# EAGLE board MDCluster (EAGLE 9.6.2), part 1 of 2
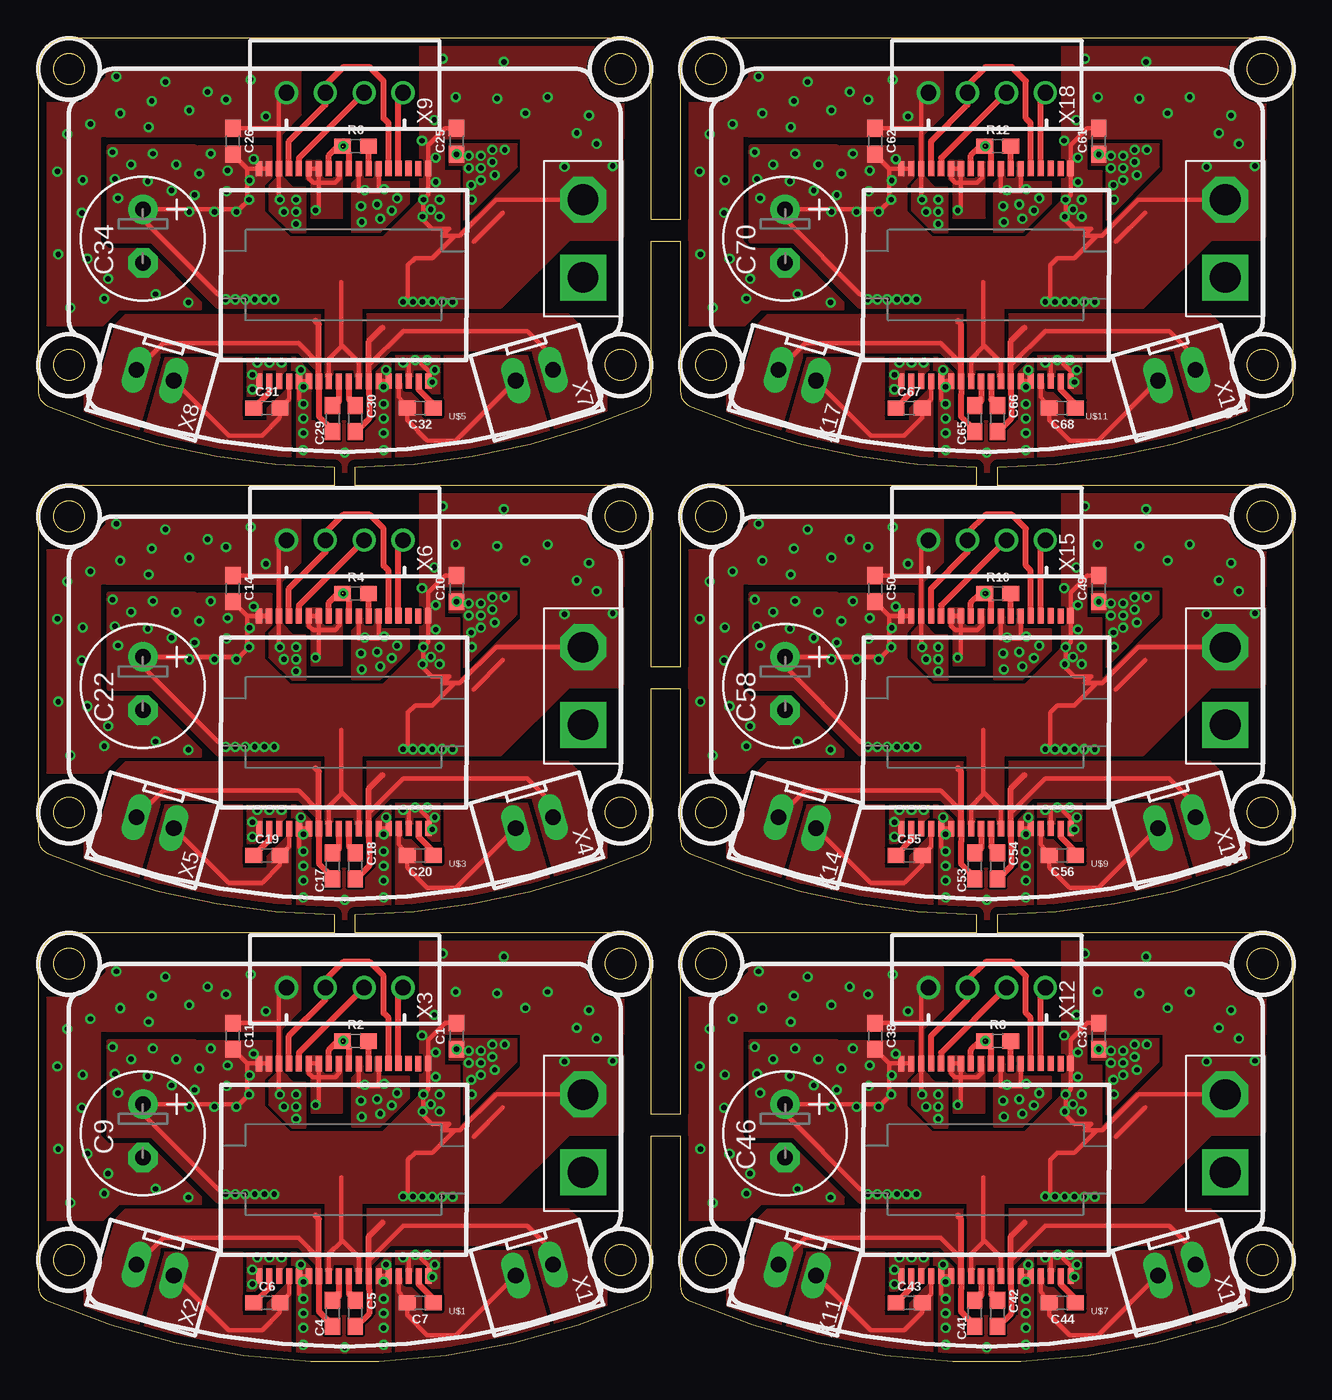
[diagram p0: board, top side]
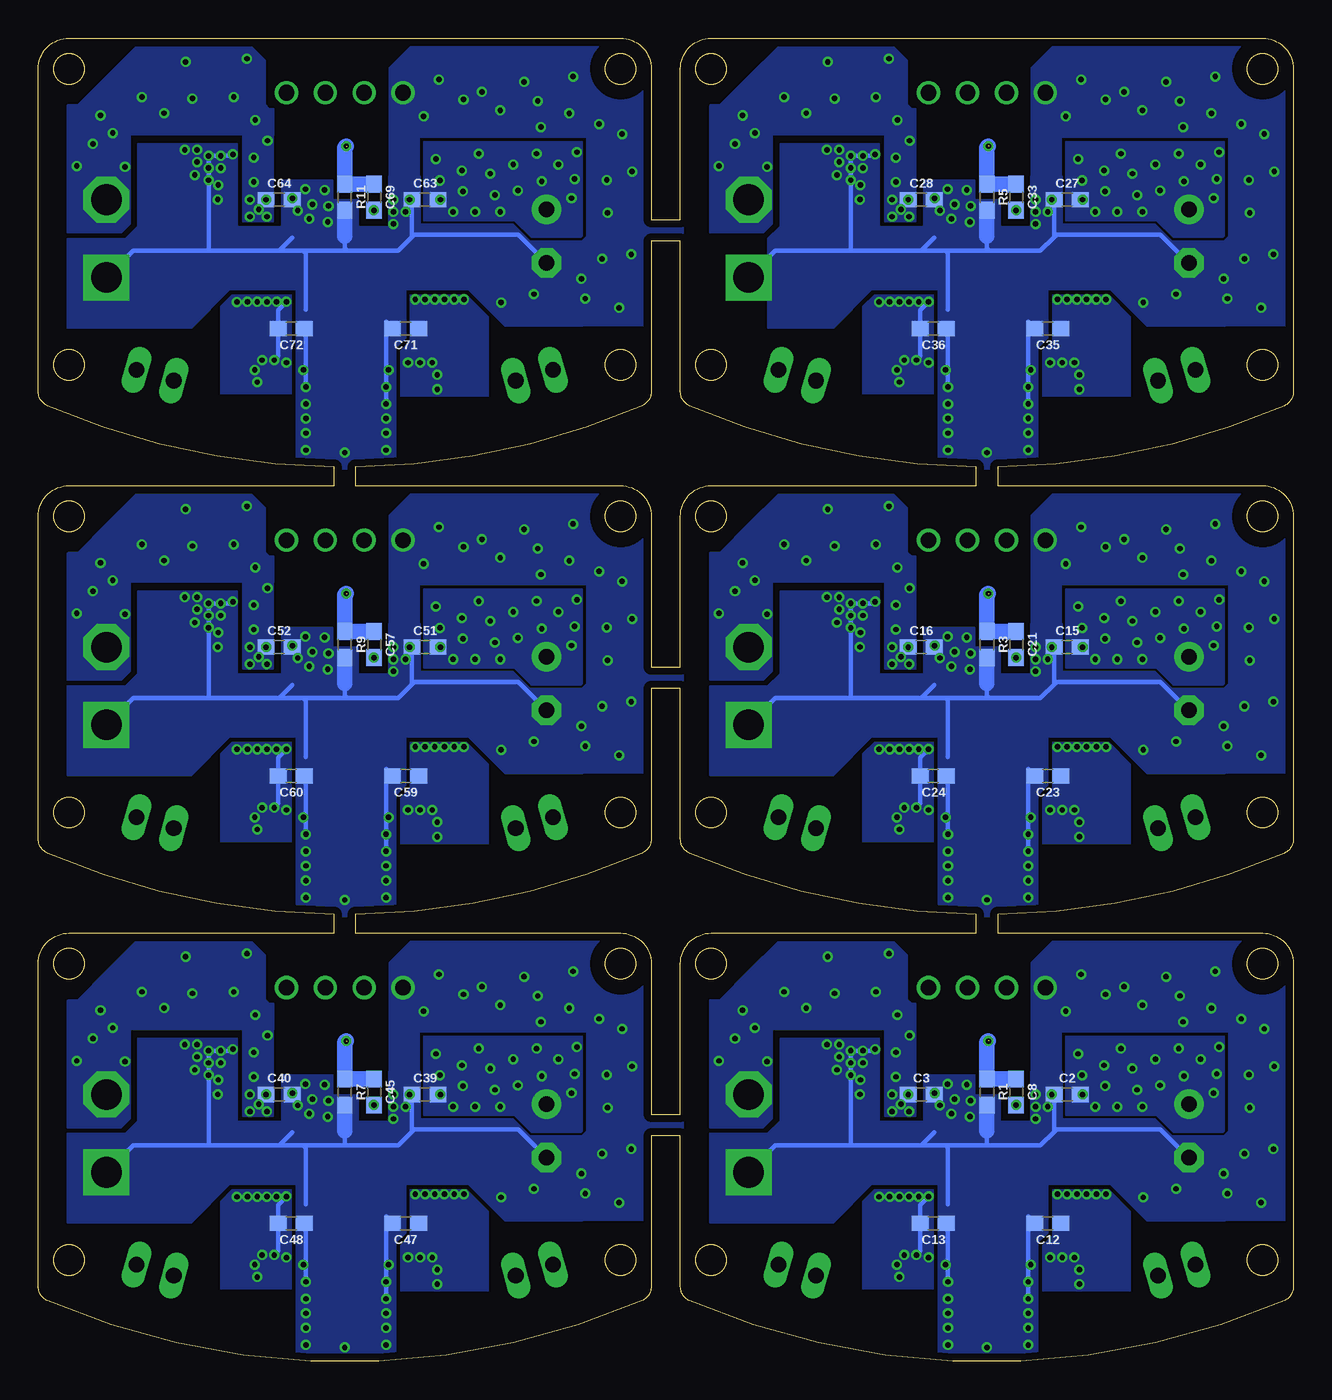
[diagram p1: board, bottom side, seen from below]

Size 81.91 x 86.37 mm. Coordinates in mm from the lower left corner, seen from the top.
Outline: 40,73.13 41.91,73.13 41.91,63.29 arc67 42.51,62.37 arc22 61.21,58.38 61.21,57.16 43.91,57.16 arc90 41.91,55.16 41.91,45.32 40,45.32 40,55.16 arc90 38,57.16 20.7,57.16 20.7,58.38 arc22 39.4,62.37 arc67 40,63.29 40,73.13
Outline: 40,43.92 41.91,43.92 41.91,34.08 arc67 42.51,33.16 arc22 61.21,29.17 61.21,27.95 43.91,27.95 arc90 41.91,25.95 41.91,16.11 40,16.11 40,25.95 arc90 38,27.95 20.7,27.95 20.7,29.17 arc22 39.4,33.16 arc67 40,34.08 40,43.92
Outline: 41.91,74.53 40,74.53 40,84.37 arc90 38,86.37 2,86.37 arc90 0,84.37 0,63.29 arc67 0.6,62.37 arc22 19.3,58.38 19.3,57.16 2,57.16 arc90 0,55.16 0,34.08 arc67 0.6,33.16 arc22 19.3,29.17 19.3,27.95 2,27.95 arc90 0,25.95 0,4.87 arc67 0.6,3.95 arc47 39.4,3.95 arc67 40,4.87 40,14.71 41.91,14.71 41.91,4.87 arc67 42.51,3.95 arc47 81.31,3.95 arc67 81.91,4.87 81.91,25.95 arc90 79.91,27.95 62.61,27.95 62.61,29.17 arc22 81.31,33.16 arc67 81.91,34.08 81.91,55.16 arc90 79.91,57.16 62.61,57.16 62.61,58.38 arc22 81.31,62.37 arc67 81.91,63.29 81.91,84.37 arc90 79.91,86.37 43.91,86.37 arc90 41.91,84.37 41.91,74.53
Outline: circle at 2,25.95 radius 1
Outline: circle at 38,25.95 radius 1
Outline: circle at 38,6.62 radius 1
Outline: circle at 2,6.62 radius 1
Outline: circle at 2,35.83 radius 1
Outline: circle at 2,55.16 radius 1
Outline: circle at 38,55.16 radius 1
Outline: circle at 38,35.83 radius 1
Outline: circle at 2,35.83 radius 1
Outline: circle at 2,65.04 radius 1
Outline: circle at 2,84.37 radius 1
Outline: circle at 38,84.37 radius 1
Outline: circle at 38,65.04 radius 1
Outline: circle at 2,65.04 radius 1
Outline: circle at 43.91,6.62 radius 1
Outline: circle at 43.91,25.95 radius 1
Outline: circle at 79.91,25.95 radius 1
Outline: circle at 79.91,6.62 radius 1
Outline: circle at 43.91,35.83 radius 1
Outline: circle at 43.91,55.16 radius 1
Copper layers (1*16): Top 0.035mm / dielectric 1.6mm / Bottom 0.035mm
Design rules "Elecrow_2-layer_PCB_eagle_rule": minimum track width 6mil, minimum drill 12mil, track to track 6mil, track to pad 6mil, pad to pad 6mil, via to via 8mil, smd to smd 0mil, copper to edge 20mil, drill to drill 10mil, minimum pad ring 6mil, minimum via ring 6mil, stop-mask expansion 0mil, vias tented up to drill 100mil, thermal gap 10mil
Net classes: 3 MDpow: clearance 0.2 mm
tRestrict: area 35.8,23.7 to 40.2,28.1; area 35.8,53 to 40.2,57.3; area 35.8,82.2 to 40.2,86.5; area 77.8,23.7 to 82.1,28.1; area 77.8,53 to 82.1,57.3; area 77.8,82.2 to 82.1,86.5
bRestrict: area 0.1,24 to 3.9,27.9; area 0.1,53.2 to 3.9,57.1; area 0.1,82.4 to 3.9,86.3; area 42,24 to 45.9,27.9; area 42,53.2 to 45.9,57.1; area 42,82.4 to 45.9,86.3

## Footprints (pad centres in the part's own frame; a part is rotated, then mirrored left to right if it is on the bottom)
0603 = smd 1.1 x 1: 1 -0.85,0; 2 0.85,0
E3,5-8 = drill 1.016 pad 1.93: + -1.905,0 | drill 1.016 pad 1.93 octagon: - 1.587,0
HSSOP-36 = smd 1 x 0.4: AGND -1.39,5.02; BST_A 12.49,9.58; BST_B 12.49,5.03; BST_C 12.49,4.38; BST_D 12.49,-0.17; FAULT -1.4,8.92; GND -1.39,5.67; GND_A 12.48,7.63; GND_B 12.49,6.98; GND_C 12.49,2.43; GND_D 12.49,1.78; GVDD_A 12.48,10.23; GVDD_B -1.4,10.22; GVDD_C -1.39,-0.83; GVDD_D 12.49,-0.82; M1 -1.39,2.42; M2 -1.39,3.07; M3 -1.39,3.72; OC_ADJ -1.39,6.32; OTW -1.39,9.57; OUT_A 12.48,8.28; OUT_B 12.49,6.33; OUT_C 12.49,3.08; OUT_D 12.49,1.13; PVDD_A 12.48,8.93; PVDD_B 12.49,5.68; PVDD_C 12.49,3.73; PVDD_D 12.49,0.48; PWM_A -1.4,8.27; PWM_B -1.39,6.97; PWM_C -1.39,1.77; PWM_D -1.39,0.47; RESET_AB -1.4,7.62; RESET_CD -1.39,1.12; VDD -1.39,-0.18; VREG -1.39,4.37
BAT = drill 2 octagon: + 2.54,0 | drill 2 square: G -2.54,0
JST-XH-02-PACKAGE-LONG-PAD = drill 1.016 long: 1 -1.27,0; 2 1.27,0
JST-XH-04-PACKAGE-ROUND-PAD = drill 1.016: 1 -3.81,0; 2 -1.27,0; 3 1.27,0; 4 3.81,0

## Placement (x,y rotation side)
C1  0.1uF  [0603]  27.3,21.22 90 top
C2  0.1uF  [0603]  14.76,17.41 0 bottom
C3  0.1uF  [0603]  24.29,17.41 0 bottom
C4  0.1uF  [0603]  19.21,3.13 270 top
C5  0.1uF  [0603]  20.68,3.13 270 top
C6  0.1uF  [0603]  14.92,3.81 0 top
C7  0.1uF  [0603]  24.92,3.81 180 top
C8  0.1uF  [0603]  18.09,17.57 270 bottom
C9  [E3,5-8]  6.82,14.87 270 top
C10  0.1uF  [0603]  27.3,50.43 90 top
C11  0.1uF  [0603]  12.7,21.22 270 top
C12  0.1uF  [0603]  16.03,9 180 bottom
C13  0.1uF  [0603]  23.49,9 180 bottom
C14  0.1uF  [0603]  12.7,50.43 270 top
C15  0.1uF  [0603]  14.76,46.62 0 bottom
C16  0.1uF  [0603]  24.29,46.62 0 bottom
C17  0.1uF  [0603]  19.21,32.34 270 top
C18  0.1uF  [0603]  20.68,32.34 270 top
C19  0.1uF  [0603]  14.92,33.02 0 top
C20  0.1uF  [0603]  24.92,33.02 180 top
C21  0.1uF  [0603]  18.09,46.78 270 bottom
C22  [E3,5-8]  6.82,44.08 270 top
C23  0.1uF  [0603]  16.03,38.21 180 bottom
C24  0.1uF  [0603]  23.49,38.21 180 bottom
C25  0.1uF  [0603]  27.3,79.64 90 top
C26  0.1uF  [0603]  12.7,79.64 270 top
C27  0.1uF  [0603]  14.76,75.83 0 bottom
C28  0.1uF  [0603]  24.29,75.83 0 bottom
C29  0.1uF  [0603]  19.21,61.55 270 top
C30  0.1uF  [0603]  20.68,61.55 270 top
C31  0.1uF  [0603]  14.92,62.23 0 top
C32  0.1uF  [0603]  24.92,62.23 180 top
C33  0.1uF  [0603]  18.09,75.99 270 bottom
C34  [E3,5-8]  6.82,73.29 270 top
C35  0.1uF  [0603]  16.03,67.42 180 bottom
C36  0.1uF  [0603]  23.49,67.42 180 bottom
C37  0.1uF  [0603]  69.21,21.22 90 top
C38  0.1uF  [0603]  54.61,21.22 270 top
C39  0.1uF  [0603]  56.67,17.41 0 bottom
C40  0.1uF  [0603]  66.2,17.41 0 bottom
C41  0.1uF  [0603]  61.12,3.13 270 top
C42  0.1uF  [0603]  62.59,3.13 270 top
C43  0.1uF  [0603]  56.83,3.81 0 top
C44  0.1uF  [0603]  66.83,3.81 180 top
C45  0.1uF  [0603]  60.01,17.57 270 bottom
C46  [E3,5-8]  48.73,14.87 270 top
C47  0.1uF  [0603]  57.94,9 180 bottom
C48  0.1uF  [0603]  65.4,9 180 bottom
C49  0.1uF  [0603]  69.21,50.43 90 top
C50  0.1uF  [0603]  54.61,50.43 270 top
C51  0.1uF  [0603]  56.67,46.62 0 bottom
C52  0.1uF  [0603]  66.2,46.62 0 bottom
C53  0.1uF  [0603]  61.12,32.34 270 top
C54  0.1uF  [0603]  62.59,32.34 270 top
C55  0.1uF  [0603]  56.83,33.02 0 top
C56  0.1uF  [0603]  66.83,33.02 180 top
C57  0.1uF  [0603]  60.01,46.78 270 bottom
C58  [E3,5-8]  48.73,44.08 270 top
C59  0.1uF  [0603]  57.94,38.21 180 bottom
C60  0.1uF  [0603]  65.4,38.21 180 bottom
C61  0.1uF  [0603]  69.21,79.64 90 top
C62  0.1uF  [0603]  54.61,79.64 270 top
C63  0.1uF  [0603]  56.67,75.83 0 bottom
C64  0.1uF  [0603]  66.2,75.83 0 bottom
C65  0.1uF  [0603]  61.12,61.55 270 top
C66  0.1uF  [0603]  62.59,61.55 270 top
C67  0.1uF  [0603]  56.83,62.23 0 top
C68  0.1uF  [0603]  66.83,62.23 180 top
C69  0.1uF  [0603]  60.01,75.99 270 bottom
C70  [E3,5-8]  48.73,73.29 270 top
C71  0.1uF  [0603]  57.94,67.42 180 bottom
C72  0.1uF  [0603]  65.4,67.42 180 bottom
R1  1  [0603]  20,17.57 270 bottom
R2  47k  [0603]  20.7,20.91 0 top
R3  1  [0603]  20,46.78 270 bottom
R4  47k  [0603]  20.7,50.12 0 top
R5  1  [0603]  20,75.99 270 bottom
R6  47k  [0603]  20.7,79.33 0 top
R7  1  [0603]  61.91,17.57 270 bottom
R8  47k  [0603]  62.61,20.91 0 top
R9  1  [0603]  61.91,46.78 270 bottom
R10  47k  [0603]  62.61,50.12 0 top
R11  1  [0603]  61.91,75.99 270 bottom
R12  47k  [0603]  62.61,79.33 0 top
U$1  DRV8432DKDR  [HSSOP-36]  15.24,18.05 270 top
U$2  BAT  [BAT]  35.56,14.87 90 top
U$3  DRV8432DKDR  [HSSOP-36]  15.24,47.26 270 top
U$4  BAT  [BAT]  35.56,44.08 90 top
U$5  DRV8432DKDR  [HSSOP-36]  15.24,76.47 270 top
U$6  BAT  [BAT]  35.56,73.29 90 top
U$7  DRV8432DKDR  [HSSOP-36]  57.15,18.05 270 top
U$8  BAT  [BAT]  77.47,14.87 90 top
U$9  DRV8432DKDR  [HSSOP-36]  57.15,47.26 270 top
U$10  BAT  [BAT]  77.47,44.08 90 top
U$11  DRV8432DKDR  [HSSOP-36]  57.15,76.47 270 top
U$12  BAT  [BAT]  77.47,73.29 90 top
X1  JST-XH-02-PIN-LONG-PAD  [JST-XH-02-PACKAGE-LONG-PAD]  32.38,5.95 196 top
X2  JST-XH-02-PIN-LONG-PAD  [JST-XH-02-PACKAGE-LONG-PAD]  7.62,5.95 164 top
X3  JST-XH-04-PIN-ROUND-PAD  [JST-XH-04-PACKAGE-ROUND-PAD]  20,24.4 0 top
X4  JST-XH-02-PIN-LONG-PAD  [JST-XH-02-PACKAGE-LONG-PAD]  32.38,35.16 196 top
X5  JST-XH-02-PIN-LONG-PAD  [JST-XH-02-PACKAGE-LONG-PAD]  7.62,35.16 164 top
X6  JST-XH-04-PIN-ROUND-PAD  [JST-XH-04-PACKAGE-ROUND-PAD]  20,53.61 0 top
X7  JST-XH-02-PIN-LONG-PAD  [JST-XH-02-PACKAGE-LONG-PAD]  32.38,64.37 196 top
X8  JST-XH-02-PIN-LONG-PAD  [JST-XH-02-PACKAGE-LONG-PAD]  7.62,64.37 164 top
X9  JST-XH-04-PIN-ROUND-PAD  [JST-XH-04-PACKAGE-ROUND-PAD]  20,82.82 0 top
X10  JST-XH-02-PIN-LONG-PAD  [JST-XH-02-PACKAGE-LONG-PAD]  74.29,5.95 196 top
X11  JST-XH-02-PIN-LONG-PAD  [JST-XH-02-PACKAGE-LONG-PAD]  49.53,5.95 164 top
X12  JST-XH-04-PIN-ROUND-PAD  [JST-XH-04-PACKAGE-ROUND-PAD]  61.91,24.4 0 top
X13  JST-XH-02-PIN-LONG-PAD  [JST-XH-02-PACKAGE-LONG-PAD]  74.29,35.16 196 top
X14  JST-XH-02-PIN-LONG-PAD  [JST-XH-02-PACKAGE-LONG-PAD]  49.53,35.16 164 top
X15  JST-XH-04-PIN-ROUND-PAD  [JST-XH-04-PACKAGE-ROUND-PAD]  61.91,53.61 0 top
X16  JST-XH-02-PIN-LONG-PAD  [JST-XH-02-PACKAGE-LONG-PAD]  74.29,64.37 196 top
X17  JST-XH-02-PIN-LONG-PAD  [JST-XH-02-PACKAGE-LONG-PAD]  49.53,64.37 164 top
X18  JST-XH-04-PIN-ROUND-PAD  [JST-XH-04-PACKAGE-ROUND-PAD]  61.91,82.82 0 top

## Library data of the parts
C1-C3 C10 C12 C13 C15 C16 C23-C25 C27 C28 C35-C37 C39 C40 C47-C49 C51 C52 C59-C61 C63 C64 C71 C72 = SparkFun-Capacitors; PROD_ID: CAP-08390
C4-C8 C11 C14 C17-C21 C26 C29-C33 C38 C41-C45 C50 C53-C57 C62 C65-C69 = SparkFun-Capacitors; PROD_ID: CAP-00810
C9 C22 C34 C46 C58 C70 = cap-pan40
R1 R3 R5 R7 R9 R11 = SparkFun-Resistors; PROD_ID: RES-08609
R2 R4 R6 R8 R10 R12 = SparkFun-Resistors; PROD_ID: RES-07871
U$1 U$3 U$5 U$7 U$9 U$11 = DRV8432DKDR
U$2 U$4 U$6 U$8 U$10 U$12 = BAT
X1-X18 = JST XH Connectors

## Nets
AGND1: C8.1 R1.1 R2.1 U$1.AGND U$1.M3
AGND2: C21.1 R3.1 R4.1 U$3.AGND U$3.M3
AGND3: C33.1 R5.1 R6.1 U$5.AGND U$5.M3
AGND4: C45.1 R7.1 R8.1 U$7.AGND U$7.M3
AGND5: C57.1 R9.1 R10.1 U$9.AGND U$9.M3
AGND6: C69.1 R11.1 R12.1 U$11.AGND U$11.M3
GND: C1.1 C2.1 C3.2 C9.- C11.1 C12.2 C13.1 R1.2 U$1.GND U$1.GND_A U$1.GND_B U$1.GND_C U$1.GND_D U$1.PWM_B U$1.PWM_D U$2.G X3.1
GND1: C10.1 C14.1 C15.1 C16.2 C22.- C23.2 C24.1 R3.2 U$3.GND U$3.GND_A U$3.GND_B U$3.GND_C U$3.GND_D U$3.PWM_B U$3.PWM_D U$4.G X6.1
GND2: C25.1 C26.1 C27.1 C28.2 C34.- C35.2 C36.1 R5.2 U$5.GND U$5.GND_A U$5.GND_B U$5.GND_C U$5.GND_D U$5.PWM_B U$5.PWM_D U$6.G X9.1
GND3: C37.1 C38.1 C39.1 C40.2 C46.- C47.2 C48.1 R7.2 U$7.GND U$7.GND_A U$7.GND_B U$7.GND_C U$7.GND_D U$7.PWM_B U$7.PWM_D U$8.G X12.1
GND4: C49.1 C50.1 C51.1 C52.2 C58.- C59.2 C60.1 R9.2 U$9.GND U$9.GND_A U$9.GND_B U$9.GND_C U$9.GND_D U$9.PWM_B U$9.PWM_D U$10.G X15.1
GND5: C61.1 C62.1 C63.1 C64.2 C70.- C71.2 C72.1 R11.2 U$11.GND U$11.GND_A U$11.GND_B U$11.GND_C U$11.GND_D U$11.PWM_B U$11.PWM_D U$12.G X18.1
M1_1 [MDpow]: C7.2 U$1.OUT_A X1.2
M1_2 [MDpow]: C5.2 U$1.OUT_B X1.1
M1_3 [MDpow]: C18.2 U$3.OUT_B X4.1
M1_4 [MDpow]: C20.2 U$3.OUT_A X4.2
M1_5 [MDpow]: C30.2 U$5.OUT_B X7.1
M1_6 [MDpow]: C32.2 U$5.OUT_A X7.2
M1_7 [MDpow]: C42.2 U$7.OUT_B X10.1
M1_8 [MDpow]: C44.2 U$7.OUT_A X10.2
M1_9 [MDpow]: C54.2 U$9.OUT_B X13.1
M1_10 [MDpow]: C56.2 U$9.OUT_A X13.2
M1_11 [MDpow]: C66.2 U$11.OUT_B X16.1
M1_12 [MDpow]: C68.2 U$11.OUT_A X16.2
M2_1 [MDpow]: C4.2 U$1.OUT_C X2.2
M2_2 [MDpow]: C6.2 U$1.OUT_D X2.1
M2_3 [MDpow]: C19.2 U$3.OUT_D X5.1
M2_4 [MDpow]: C17.2 U$3.OUT_C X5.2
M2_5 [MDpow]: C31.2 U$5.OUT_D X8.1
M2_6 [MDpow]: C29.2 U$5.OUT_C X8.2
M2_7 [MDpow]: C43.2 U$7.OUT_D X11.1
M2_8 [MDpow]: C41.2 U$7.OUT_C X11.2
M2_9 [MDpow]: C55.2 U$9.OUT_D X14.1
M2_10 [MDpow]: C53.2 U$9.OUT_C X14.2
M2_11 [MDpow]: C67.2 U$11.OUT_D X17.1
M2_12 [MDpow]: C65.2 U$11.OUT_C X17.2
MDRST: U$1.RESET_AB U$1.RESET_CD X3.2
MDRST1: U$3.RESET_AB U$3.RESET_CD X6.2
MDRST2: U$5.RESET_AB U$5.RESET_CD X9.2
MDRST3: U$7.RESET_AB U$7.RESET_CD X12.2
MDRST4: U$9.RESET_AB U$9.RESET_CD X15.2
MDRST5: U$11.RESET_AB U$11.RESET_CD X18.2
N$1: C19.1 U$3.BST_D
N$2: C17.1 U$3.BST_C
N$3: C18.1 U$3.BST_B
N$4: C20.1 U$3.BST_A
N$5: C6.1 U$1.BST_D
N$6: C4.1 U$1.BST_C
N$7: C5.1 U$1.BST_B
N$8: C7.1 U$1.BST_A
N$9: R4.2 U$3.OC_ADJ
N$10: C31.1 U$5.BST_D
N$11: C29.1 U$5.BST_C
N$12: R2.2 U$1.OC_ADJ
N$13: C30.1 U$5.BST_B
N$14: C32.1 U$5.BST_A
N$15: R6.2 U$5.OC_ADJ
N$16: C43.1 U$7.BST_D
N$17: C41.1 U$7.BST_C
N$18: C42.1 U$7.BST_B
N$19: C44.1 U$7.BST_A
N$20: R8.2 U$7.OC_ADJ
N$21: C55.1 U$9.BST_D
N$22: C53.1 U$9.BST_C
N$23: C54.1 U$9.BST_B
N$24: C56.1 U$9.BST_A
N$25: R10.2 U$9.OC_ADJ
N$26: C67.1 U$11.BST_D
N$27: C65.1 U$11.BST_C
N$28: C66.1 U$11.BST_B
N$29: C68.1 U$11.BST_A
N$30: R12.2 U$11.OC_ADJ
PWM1: U$1.PWM_A X3.4
PWM2: U$1.PWM_C X3.3
PWM3: U$3.PWM_C X6.3
PWM4: U$3.PWM_A X6.4
PWM5: U$5.PWM_C X9.3
PWM6: U$5.PWM_A X9.4
PWM7: U$7.PWM_C X12.3
PWM8: U$7.PWM_A X12.4
PWM9: U$9.PWM_C X15.3
PWM10: U$9.PWM_A X15.4
PWM11: U$11.PWM_C X18.3
PWM12: U$11.PWM_A X18.4
VM: C1.2 C2.2 C3.1 C9.+ C11.2 C12.1 C13.2 U$1.GVDD_A U$1.GVDD_B U$1.GVDD_C U$1.GVDD_D U$1.PVDD_A U$1.PVDD_B U$1.PVDD_C U$1.PVDD_D U$1.VDD U$2.+
VM1: C10.2 C14.2 C15.2 C16.1 C22.+ C23.1 C24.2 U$3.GVDD_A U$3.GVDD_B U$3.GVDD_C U$3.GVDD_D U$3.PVDD_A U$3.PVDD_B U$3.PVDD_C U$3.PVDD_D U$3.VDD U$4.+
VM2: C25.2 C26.2 C27.2 C28.1 C34.+ C35.1 C36.2 U$5.GVDD_A U$5.GVDD_B U$5.GVDD_C U$5.GVDD_D U$5.PVDD_A U$5.PVDD_B U$5.PVDD_C U$5.PVDD_D U$5.VDD U$6.+
VM3: C37.2 C38.2 C39.2 C40.1 C46.+ C47.1 C48.2 U$7.GVDD_A U$7.GVDD_B U$7.GVDD_C U$7.GVDD_D U$7.PVDD_A U$7.PVDD_B U$7.PVDD_C U$7.PVDD_D U$7.VDD U$8.+
VM4: C49.2 C50.2 C51.2 C52.1 C58.+ C59.1 C60.2 U$9.GVDD_A U$9.GVDD_B U$9.GVDD_C U$9.GVDD_D U$9.PVDD_A U$9.PVDD_B U$9.PVDD_C U$9.PVDD_D U$9.VDD U$10.+
VM5: C61.2 C62.2 C63.2 C64.1 C70.+ C71.1 C72.2 U$11.GVDD_A U$11.GVDD_B U$11.GVDD_C U$11.GVDD_D U$11.PVDD_A U$11.PVDD_B U$11.PVDD_C U$11.PVDD_D U$11.VDD U$12.+
VREG1: C8.2 U$1.M1 U$1.M2 U$1.VREG
VREG2: C21.2 U$3.M1 U$3.M2 U$3.VREG
VREG3: C33.2 U$5.M1 U$5.M2 U$5.VREG
VREG4: C45.2 U$7.M1 U$7.M2 U$7.VREG
VREG5: C57.2 U$9.M1 U$9.M2 U$9.VREG
VREG6: C69.2 U$11.M1 U$11.M2 U$11.VREG

## Tracks (layer width: path | path; a pad name or v marks a point on that pad's centre or on a via)
AGND1  (via drill 0.35)  (1 unrouted)
  Top 0.3: 19.55,20.91 R2.1
  Top 0.4: U$1.M3 18.96,20.31 19.55,20.91 | R2.1 20.26,20.5 U$1.AGND
  Bottom 1: C8.1 R1.1 20,20.81 v19.9,20.91
AGND2  (via drill 0.35)  (1 unrouted)
  Top 0.3: 19.55,50.12 R4.1
  Top 0.4: U$3.M3 18.96,49.52 19.55,50.12 | R4.1 20.26,49.71 U$3.AGND
  Bottom 1: C21.1 R3.1 20,50.02 v19.9,50.12
AGND3  (via drill 0.35)  (1 unrouted)
  Top 0.3: 19.55,79.33 R6.1
  Top 0.4: U$5.M3 18.96,78.73 19.55,79.33 | R6.1 20.26,78.92 U$5.AGND
  Bottom 1: C33.1 R5.1 20,79.23 v19.9,79.33
AGND4  (via drill 0.35)  (1 unrouted)
  Top 0.3: 61.46,20.91 R8.1
  Top 0.4: U$7.M3 60.87,20.31 61.46,20.91 | R8.1 62.17,20.5 U$7.AGND
  Bottom 1: C45.1 R7.1 61.91,20.81 v61.81,20.91
AGND5  (via drill 0.35)  (1 unrouted)
  Top 0.3: 61.46,50.12 R10.1
  Top 0.4: U$9.M3 60.87,49.52 61.46,50.12 | R10.1 62.17,49.71 U$9.AGND
  Bottom 1: C57.1 R9.1 61.91,50.02 v61.81,50.12
AGND6  (via drill 0.35)  (1 unrouted)
  Top 0.3: 61.46,79.33 R12.1
  Top 0.4: U$11.M3 60.87,78.73 61.46,79.33 | R12.1 62.17,78.92 U$11.AGND
  Bottom 1: C69.1 R11.1 61.91,79.23 v61.81,79.33
GND  (via drill 0.35)
  Top 0.3: C11.1 15.61,22.07 15.71,22.18 | 15.71,22.18 U$1.PWM_D 15.71,17.48 v15.77,17.41 | U$1.PWM_B 22.21,17.96 20.91,17.96 U$1.GND | X3.1 15.71,23.92 15.71,22.18 | U$1.GND_B 22.38,5.39 22.38,5.57 22.54,5.57 | 22.54,5.57 U$1.GND_A | U$1.GND_C U$1.GND_D 17.02,4.36 v17.3,4.08 | 22.54,5.57 v22.54,5.19
  Bottom 0.3: C2.1 15.61,14.98 | 15.61,14.98 15.45,15.13 8.67,15.13 C9.- | 15.61,14.98 16.51,14.08 19.84,14.08 | U$2.G 33.81,14.08 28.89,14.08 | 19.84,14.08 22.7,14.08 | 22.7,14.08 24.29,14.08 | 24.29,14.08 28.89,14.08 | 19.84,14.08 20,14.24 20,15.03 | C1.1 27.41,20.27 v28.89,20.27 28.89,14.08 | v17.3,4.08 v17.3,5.19 17.3,9.47 C12.2 | v22.54,5.19 22.54,8.39 C13.1 | 22.54,10.24 22.54,13.92 22.7,14.08 | 23.44,14.93 24.29,14.08
  Bottom 1: R1.2 20,15.03
  other vias: 27.3,20.37 16.03,16.62 16.82,16.62 16.82,17.41 16.82,15.83 21.31,18.05 22.56,18.1 22.11,17.1 21.06,17 21.11,15.96 28.89,19.48 28.25,18.37 28.1,19.48 28.1,20.27 28.89,18.68 17.14,6.3 22.31,16.16 22.54,4.08 22.7,6.3 17.3,2.17 22.54,3.13 17.3,1.06 22.54,1.06 17.3,3.13 22.54,2.17 20,0.9 23.41,17.5 29.64,20.67 29.64,19.87 30.44,20.67 23.06,16.7 29.79,19.02 28.29,17.42 5.1,25.45 5.35,23.05 7.4,23.85 8.3,25.1 9.85,23.25 11.05,24.45 12.25,23.95 13.85,25.25 14.85,22.85 7.2,22.15 4.55,12.25 7.65,11.25 2.1,10.35 1.3,13.85 2.85,16.55 1.25,19.25 3.4,22.35 9.8,10.7 3.2,13.55 4.3,10.95 2.9,18.7 1.9,21.7
  pour Top (no thermals): 15.55,21.54 15.55,18.81 15.08,18.33 15.08,16.74 16.57,15.25 17.46,15.25 17.46,18.21 16.61,18.21 15.87,18.94 15.87,21.7 17.14,22.97 17.14,25.99 4.45,25.99 4.45,21.54
  pour Bottom (no thermals): 15.08,18.94 17.14,18.94 17.14,15.67 33.49,15.67 34.29,14.87 38.1,14.87 38.1,9.04 30.03,9.04 27.54,11.54 11.9,11.54 9.52,9.16 4.45,9.16 4.45,14.71 7.94,14.71 9.05,15.83 15.08,15.83
  pour Bottom (no thermals): 20.79,18.68 24.12,18.68 24.12,15.19 19.12,15.19 19.12,17.4 20.79,17.4
  pour Bottom (no thermals): 27.03,21.06 33.49,21.06 33.49,14.87 27.03,14.87
  pour Top (no thermals): 16.51,7.09 16.51,6.3 16.67,6.3 16.82,6.14 16.82,-0.05 17.83,-0.05 17.83,6.09 16.82,7.09
  pour Bottom (no thermals): 16.03,8.36 16.67,7.73 16.67,-0.21 23.18,-0.21 23.18,12.02 16.19,12.02 16.03,11.86
  pour Top (no thermals): 26.83,21.06 31.23,21.06 31.23,19.53 27.78,16.09 27.78,19.64 26.83,19.64
  pour Top (no thermals): 22.06,-0.05 22.06,6.14 23.02,7.09 23.02,-0.05
  pour Top: 16.98,2.97 23.02,2.97 23.02,-0.37 16.98,-0.37
  pour Top (no thermals): 20.75,19.9 20.75,18.75 20.45,18.45 20.45,15.3 22.3,15.3 24.2,17.2 24.2,18.6 22.35,18.6 22.35,19.85 20.8,19.85
  pour Bottom (no thermals): 17.1,26 17.1,16.25 17.15,16.2 15.1,16.2 15.1,18.9 15.15,18.95 15.15,21.5 4.2,21.5 4.2,15 4.5,14.7 7.85,14.7 7.85,9.2 -1.6,9.2 -2.1,9.7 -2.1,28.35 -1.6,28.85 14.25,28.85
  pour Top (no thermals): 4.55,14.2 7.15,14.2 10.65,10.7 10.65,10.25 5.25,10.25 4.2,9.2 0.6,9.2 0.55,9.15 0.55,23.75 2.8,23.75 2.9,23.85 4.45,25.4 4.45,25.95 5.95,25.95 5.75,25.75 5.75,21.55 4.25,21.55 4.1,21.55 4.05,21.5 4.05,14.7
GND1  (via drill 0.35)
  Top 0.3: C14.1 15.61,51.28 15.71,51.39 | 15.71,51.39 U$3.PWM_D 15.71,46.69 v15.77,46.62 | U$3.PWM_B 22.21,47.17 20.91,47.17 U$3.GND | X6.1 15.71,53.13 15.71,51.39 | U$3.GND_B 22.38,34.6 22.38,34.78 22.54,34.78 | 22.54,34.78 U$3.GND_A | U$3.GND_C U$3.GND_D 17.02,33.57 v17.3,33.29 | 22.54,34.78 v22.54,34.4
  Bottom 0.3: C15.1 15.61,44.19 | 15.61,44.19 15.45,44.34 8.67,44.34 C22.- | 15.61,44.19 16.51,43.29 19.84,43.29 | U$4.G 33.81,43.29 28.89,43.29 | 19.84,43.29 22.7,43.29 | 22.7,43.29 24.29,43.29 | 24.29,43.29 28.89,43.29 | 19.84,43.29 20,43.45 20,44.24 | C10.1 27.41,49.48 v28.89,49.48 28.89,43.29 | v17.3,33.29 v17.3,34.4 17.3,38.68 C23.2 | v22.54,34.4 22.54,37.6 C24.1 | 22.54,39.45 22.54,43.13 22.7,43.29 | 23.44,44.14 24.29,43.29
  Bottom 1: R3.2 20,44.24
  other vias: 27.3,49.58 16.03,45.83 16.82,45.83 16.82,46.62 16.82,45.04 21.31,47.26 22.56,47.31 22.11,46.31 21.06,46.21 21.11,45.17 28.89,48.69 28.25,47.58 28.1,48.69 28.1,49.48 28.89,47.89 17.14,35.51 22.31,45.37 22.54,33.29 22.7,35.51 17.3,31.38 22.54,32.34 17.3,30.27 22.54,30.27 17.3,32.34 22.54,31.38 20,30.11 23.41,46.71 29.64,49.88 29.64,49.08 30.44,49.88 23.06,45.91 29.79,48.23 28.29,46.63 5.1,54.66 5.35,52.26 7.4,53.06 8.3,54.31 9.85,52.46 11.05,53.66 12.25,53.16 13.85,54.46 14.85,52.06 7.2,51.36 4.55,41.46 7.65,40.46 2.1,39.56 1.3,43.06 2.85,45.76 1.25,48.46 3.4,51.56 9.8,39.91 3.2,42.76 4.3,40.16 2.9,47.91 1.9,50.91
  pour Top (no thermals): 15.55,50.75 15.55,48.02 15.08,47.54 15.08,45.95 16.57,44.46 17.46,44.46 17.46,47.42 16.61,47.42 15.87,48.15 15.87,50.91 17.14,52.18 17.14,55.2 4.45,55.2 4.45,50.75
  pour Bottom (no thermals): 15.08,48.15 17.14,48.15 17.14,44.88 33.49,44.88 34.29,44.08 38.1,44.08 38.1,38.25 30.03,38.25 27.54,40.75 11.9,40.75 9.52,38.37 4.45,38.37 4.45,43.92 7.94,43.92 9.05,45.04 15.08,45.04
  pour Bottom (no thermals): 20.79,47.89 24.12,47.89 24.12,44.4 19.12,44.4 19.12,46.61 20.79,46.61
  pour Bottom (no thermals): 27.03,50.27 33.49,50.27 33.49,44.08 27.03,44.08
  pour Top (no thermals): 16.51,36.3 16.51,35.51 16.67,35.51 16.82,35.35 16.82,29.16 17.83,29.16 17.83,35.3 16.82,36.3
  pour Bottom (no thermals): 16.03,37.57 16.67,36.94 16.67,29 23.18,29 23.18,41.23 16.19,41.23 16.03,41.07
  pour Top (no thermals): 26.83,50.27 31.23,50.27 31.23,48.74 27.78,45.3 27.78,48.85 26.83,48.85
  pour Top (no thermals): 22.06,29.16 22.06,35.35 23.02,36.3 23.02,29.16
  pour Top: 16.98,32.18 23.02,32.18 23.02,28.84 16.98,28.84
  pour Top (no thermals): 20.75,49.11 20.75,47.96 20.45,47.66 20.45,44.51 22.3,44.51 24.2,46.41 24.2,47.81 22.35,47.81 22.35,49.06 20.8,49.06
  pour Bottom (no thermals): 17.1,55.21 17.1,45.46 17.15,45.41 15.1,45.41 15.1,48.11 15.15,48.16 15.15,50.71 4.2,50.71 4.2,44.21 4.5,43.91 7.85,43.91 7.85,38.41 -1.6,38.41 -2.1,38.91 -2.1,57.56 -1.6,58.06 14.25,58.06
  pour Top (no thermals): 4.55,43.41 7.15,43.41 10.65,39.91 10.65,39.46 5.25,39.46 4.2,38.41 0.6,38.41 0.55,38.36 0.55,52.96 2.8,52.96 2.9,53.06 4.45,54.61 4.45,55.16 5.95,55.16 5.75,54.96 5.75,50.76 4.25,50.76 4.1,50.76 4.05,50.71 4.05,43.91
GND2  (via drill 0.35)
  Top 0.3: C26.1 15.61,80.49 15.71,80.6 | 15.71,80.6 U$5.PWM_D 15.71,75.9 v15.77,75.83 | U$5.PWM_B 22.21,76.38 20.91,76.38 U$5.GND | X9.1 15.71,82.34 15.71,80.6 | U$5.GND_B 22.38,63.81 22.38,63.99 22.54,63.99 | 22.54,63.99 U$5.GND_A | U$5.GND_C U$5.GND_D 17.02,62.78 v17.3,62.5 | 22.54,63.99 v22.54,63.61
  Bottom 0.3: C27.1 15.61,73.4 | 15.61,73.4 15.45,73.55 8.67,73.55 C34.- | 15.61,73.4 16.51,72.5 19.84,72.5 | U$6.G 33.81,72.5 28.89,72.5 | 19.84,72.5 22.7,72.5 | 22.7,72.5 24.29,72.5 | 24.29,72.5 28.89,72.5 | 19.84,72.5 20,72.66 20,73.45 | C25.1 27.41,78.69 v28.89,78.69 28.89,72.5 | v17.3,62.5 v17.3,63.61 17.3,67.89 C35.2 | v22.54,63.61 22.54,66.81 C36.1 | 22.54,68.66 22.54,72.34 22.7,72.5 | 23.44,73.35 24.29,72.5
  Bottom 1: R5.2 20,73.45
  other vias: 27.3,78.79 16.03,75.04 16.82,75.04 16.82,75.83 16.82,74.25 21.31,76.47 22.56,76.52 22.11,75.52 21.06,75.42 21.11,74.38 28.89,77.9 28.25,76.79 28.1,77.9 28.1,78.69 28.89,77.1 17.14,64.72 22.31,74.58 22.54,62.5 22.7,64.72 17.3,60.59 22.54,61.55 17.3,59.48 22.54,59.48 17.3,61.55 22.54,60.59 20,59.32 23.41,75.92 29.64,79.09 29.64,78.29 30.44,79.09 23.06,75.12 29.79,77.44 28.29,75.84 5.1,83.87 5.35,81.47 7.4,82.27 8.3,83.52 9.85,81.67 11.05,82.87 12.25,82.37 13.85,83.67 14.85,81.27 7.2,80.57 4.55,70.67 7.65,69.67 2.1,68.77 1.3,72.27 2.85,74.97 1.25,77.67 3.4,80.77 9.8,69.12 3.2,71.97 4.3,69.37 2.9,77.12 1.9,80.12
  pour Top (no thermals): 15.55,79.96 15.55,77.23 15.08,76.75 15.08,75.16 16.57,73.67 17.46,73.67 17.46,76.63 16.61,76.63 15.87,77.36 15.87,80.12 17.14,81.39 17.14,84.41 4.45,84.41 4.45,79.96
  pour Bottom (no thermals): 15.08,77.36 17.14,77.36 17.14,74.09 33.49,74.09 34.29,73.29 34.29,67.46 30.03,67.46 27.54,69.96 11.9,69.96 9.52,67.58 4.45,67.58 4.45,73.13 7.94,73.13 9.05,74.25 15.08,74.25
  pour Bottom (no thermals): 20.79,77.1 24.12,77.1 24.12,73.61 19.12,73.61 19.12,75.82 20.79,75.82
  pour Bottom (no thermals): 27.03,79.48 33.49,79.48 33.49,73.29 27.03,73.29
  pour Top (no thermals): 16.51,65.51 16.51,64.72 16.67,64.72 16.82,64.56 16.82,58.37 17.83,58.37 17.83,64.51 16.82,65.51
  pour Bottom (no thermals): 16.03,66.78 16.67,66.15 16.67,58.21 23.18,58.21 23.18,70.44 16.19,70.44 16.03,70.28
  pour Top (no thermals): 26.83,79.48 31.23,79.48 31.23,77.95 27.78,74.51 27.78,78.06 26.83,78.06
  pour Top (no thermals): 22.06,58.37 22.06,64.56 23.02,65.51 23.02,58.37
  pour Top: 16.98,61.39 23.02,61.39 23.02,58.05 16.98,58.05
  pour Top (no thermals): 20.75,78.32 20.75,77.17 20.45,76.87 20.45,73.72 22.3,73.72 24.2,75.62 24.2,77.02 22.35,77.02 22.35,78.27 20.8,78.27
  pour Bottom (no thermals): 17.1,84.42 17.1,74.67 17.15,74.62 15.1,74.62 15.1,77.32 15.15,77.37 15.15,79.92 4.2,79.92 4.2,73.42 4.5,73.12 7.85,73.12 7.85,67.62 -1.6,67.62 -2.1,68.12 -2.1,86.77 -1.6,87.27 14.25,87.27
  pour Top (no thermals): 4.55,72.62 7.15,72.62 10.65,69.12 10.65,68.67 5.25,68.67 4.2,67.62 0.6,67.62 0.55,67.57 0.55,82.17 2.8,82.17 2.9,82.27 4.45,83.82 4.45,84.37 5.95,84.37 5.75,84.17 5.75,79.97 4.25,79.97 4.1,79.97 4.05,79.92 4.05,73.12
GND3  (via drill 0.35)
  Top 0.3: C38.1 57.52,22.07 57.62,22.18 | 57.62,22.18 U$7.PWM_D 57.62,17.48 v57.68,17.41 | U$7.PWM_B 64.12,17.96 62.82,17.96 U$7.GND | X12.1 57.62,23.92 57.62,22.18 | U$7.GND_B 64.29,5.39 64.29,5.57 64.45,5.57 | 64.45,5.57 U$7.GND_A | U$7.GND_C U$7.GND_D 58.93,4.36 v59.21,4.08 | 64.45,5.57 v64.45,5.19
  Bottom 0.3: C39.1 57.52,14.98 | 57.52,14.98 57.36,15.13 50.58,15.13 C46.- | 57.52,14.98 58.42,14.08 61.75,14.08 | U$8.G 75.72,14.08 70.8,14.08 | 61.75,14.08 64.61,14.08 | 64.61,14.08 66.2,14.08 | 66.2,14.08 70.8,14.08 | 61.75,14.08 61.91,14.24 61.91,15.03 | C37.1 69.32,20.27 v70.8,20.27 70.8,14.08 | v59.21,4.08 v59.21,5.19 59.21,9.47 C47.2 | v64.45,5.19 64.45,8.39 C48.1 | 64.45,10.24 64.45,13.92 64.61,14.08 | 65.35,14.93 66.2,14.08
  Bottom 1: R7.2 61.91,15.03
  other vias: 69.21,20.37 57.94,16.62 58.73,16.62 58.73,17.41 58.73,15.83 63.22,18.05 64.47,18.1 64.02,17.1 62.97,17 63.02,15.96 70.8,19.48 70.17,18.37 70.01,19.48 70.01,20.27 70.8,18.68 59.05,6.3 64.22,16.16 64.45,4.08 64.61,6.3 59.21,2.17 64.45,3.13 59.21,1.06 64.45,1.06 59.21,3.13 64.45,2.17 61.91,0.9 65.32,17.5 71.55,20.67 71.55,19.87 72.35,20.67 64.97,16.7 71.7,19.02 70.2,17.42 47.01,25.45 47.26,23.05 49.31,23.85 50.21,25.1 51.76,23.25 52.96,24.45 54.16,23.95 55.76,25.25 56.76,22.85 49.11,22.15 46.46,12.25 49.56,11.25 44.01,10.35 43.21,13.85 44.76,16.55 43.16,19.25 45.31,22.35 51.71,10.7 45.11,13.55 46.21,10.95 44.81,18.7 43.81,21.7
  pour Top (no thermals): 57.46,21.54 57.46,18.81 56.99,18.33 56.99,16.74 58.48,15.25 59.37,15.25 59.37,18.21 58.52,18.21 57.78,18.94 57.78,21.7 59.05,22.97 59.05,25.99 46.36,25.99 46.36,21.54
  pour Bottom (no thermals): 56.99,18.94 59.05,18.94 59.05,15.67 75.4,15.67 76.2,14.87 80.01,14.87 80.01,9.04 71.94,9.04 69.45,11.54 53.81,11.54 51.43,9.16 46.36,9.16 46.36,14.71 49.84,14.71 50.96,15.83 56.99,15.83
  pour Bottom (no thermals): 62.7,18.68 66.03,18.68 66.03,15.19 61.03,15.19 61.03,17.4 62.7,17.4
  pour Bottom (no thermals): 68.94,21.06 75.4,21.06 75.4,14.87 68.94,14.87
  pour Top (no thermals): 58.42,7.09 58.42,6.3 58.58,6.3 58.73,6.14 58.73,-0.05 59.74,-0.05 59.74,6.09 58.73,7.09
  pour Bottom (no thermals): 57.94,8.36 58.58,7.73 58.58,-0.21 65.09,-0.21 65.09,12.02 58.1,12.02 57.94,11.86
  pour Top (no thermals): 68.74,21.06 73.14,21.06 73.14,19.53 69.69,16.09 69.69,19.64 68.74,19.64
  pour Top (no thermals): 63.97,-0.05 63.97,6.14 64.93,7.09 64.93,-0.05
  pour Top: 58.89,2.97 64.93,2.97 64.93,-0.37 58.89,-0.37
  pour Top (no thermals): 62.66,19.9 62.66,18.75 62.36,18.45 62.36,15.3 64.21,15.3 66.11,17.2 66.11,18.6 64.26,18.6 64.26,19.85 62.71,19.85
  pour Bottom (no thermals): 59.01,26 59.01,16.25 59.06,16.2 57.01,16.2 57.01,18.9 57.06,18.95 57.06,21.5 46.11,21.5 46.11,15 46.41,14.7 49.76,14.7 49.76,9.2 40.31,9.2 39.81,9.7 39.81,28.35 40.31,28.85 56.16,28.85
  pour Top (no thermals): 46.46,14.2 49.06,14.2 52.56,10.7 52.56,10.25 47.16,10.25 46.11,9.2 42.51,9.2 42.46,9.15 42.46,23.75 44.71,23.75 44.81,23.85 46.36,25.4 46.36,25.95 47.86,25.95 47.66,25.75 47.66,21.55 46.16,21.55 46.01,21.55 45.96,21.5 45.96,14.7
GND4  (via drill 0.35)
  Top 0.3: C50.1 57.52,51.28 57.62,51.39 | 57.62,51.39 U$9.PWM_D 57.62,46.69 v57.68,46.62 | U$9.PWM_B 64.12,47.17 62.82,47.17 U$9.GND | X15.1 57.62,53.13 57.62,51.39 | U$9.GND_B 64.29,34.6 64.29,34.78 64.45,34.78 | 64.45,34.78 U$9.GND_A | U$9.GND_C U$9.GND_D 58.93,33.57 v59.21,33.29 | 64.45,34.78 v64.45,34.4
  Bottom 0.3: C51.1 57.52,44.19 | 57.52,44.19 57.36,44.34 50.58,44.34 C58.- | 57.52,44.19 58.42,43.29 61.75,43.29 | U$10.G 75.72,43.29 70.8,43.29 | 61.75,43.29 64.61,43.29 | 64.61,43.29 66.2,43.29 | 66.2,43.29 70.8,43.29 | 61.75,43.29 61.91,43.45 61.91,44.24 | C49.1 69.32,49.48 v70.8,49.48 70.8,43.29 | v59.21,33.29 v59.21,34.4 59.21,38.68 C59.2 | v64.45,34.4 64.45,37.6 C60.1 | 64.45,39.45 64.45,43.13 64.61,43.29 | 65.35,44.14 66.2,43.29
  Bottom 1: R9.2 61.91,44.24
  other vias: 69.21,49.58 57.94,45.83 58.73,45.83 58.73,46.62 58.73,45.04 63.22,47.26 64.47,47.31 64.02,46.31 62.97,46.21 63.02,45.17 70.8,48.69 70.17,47.58 70.01,48.69 70.01,49.48 70.8,47.89 59.05,35.51 64.22,45.37 64.45,33.29 64.61,35.51 59.21,31.38 64.45,32.34 59.21,30.27 64.45,30.27 59.21,32.34 64.45,31.38 61.91,30.11 65.32,46.71 71.55,49.88 71.55,49.08 72.35,49.88 64.97,45.91 71.7,48.23 70.2,46.63 47.01,54.66 47.26,52.26 49.31,53.06 50.21,54.31 51.76,52.46 52.96,53.66 54.16,53.16 55.76,54.46 56.76,52.06 49.11,51.36 46.46,41.46 49.56,40.46 44.01,39.56 43.21,43.06 44.76,45.76 43.16,48.46 45.31,51.56 51.71,39.91 45.11,42.76 46.21,40.16 44.81,47.91 43.81,50.91
  pour Top (no thermals): 57.46,50.75 57.46,48.02 56.99,47.54 56.99,45.95 58.48,44.46 59.37,44.46 59.37,47.42 58.52,47.42 57.78,48.15 57.78,50.91 59.05,52.18 59.05,55.2 46.36,55.2 46.36,50.75
  pour Bottom (no thermals): 56.99,48.15 59.05,48.15 59.05,44.88 75.4,44.88 76.2,44.08 80.01,44.08 80.01,38.25 71.94,38.25 69.45,40.75 53.81,40.75 51.43,38.37 46.36,38.37 46.36,43.92 49.84,43.92 50.96,45.04 56.99,45.04
  pour Bottom (no thermals): 62.7,47.89 66.03,47.89 66.03,44.4 61.03,44.4 61.03,46.61 62.7,46.61
  pour Bottom (no thermals): 68.94,50.27 75.4,50.27 75.4,44.08 68.94,44.08
  pour Top (no thermals): 58.42,36.3 58.42,35.51 58.58,35.51 58.73,35.35 58.73,29.16 59.74,29.16 59.74,35.3 58.73,36.3
  pour Bottom (no thermals): 57.94,37.57 58.58,36.94 58.58,29 65.09,29 65.09,41.23 58.1,41.23 57.94,41.07
  pour Top (no thermals): 68.74,50.27 73.14,50.27 73.14,48.74 69.69,45.3 69.69,48.85 68.74,48.85
  pour Top (no thermals): 63.97,29.16 63.97,35.35 64.93,36.3 64.93,29.16
  pour Top: 58.89,32.18 64.93,32.18 64.93,28.84 58.89,28.84
  pour Top (no thermals): 62.66,49.11 62.66,47.96 62.36,47.66 62.36,44.51 64.21,44.51 66.11,46.41 66.11,47.81 64.26,47.81 64.26,49.06 62.71,49.06
  pour Bottom (no thermals): 59.01,55.21 59.01,45.46 59.06,45.41 57.01,45.41 57.01,48.11 57.06,48.16 57.06,50.71 46.11,50.71 46.11,44.21 46.41,43.91 49.76,43.91 49.76,38.41 40.31,38.41 39.81,38.91 39.81,57.56 40.31,58.06 56.16,58.06
  pour Top (no thermals): 46.46,43.41 49.06,43.41 52.56,39.91 52.56,39.46 47.16,39.46 46.11,38.41 42.51,38.41 42.46,38.36 42.46,52.96 44.71,52.96 44.81,53.06 46.36,54.61 46.36,55.16 47.86,55.16 47.66,54.96 47.66,50.76 46.16,50.76 46.01,50.76 45.96,50.71 45.96,43.91
GND5  (via drill 0.35)
  Top 0.3: C62.1 57.52,80.49 57.62,80.6 | 57.62,80.6 U$11.PWM_D 57.62,75.9 v57.68,75.83 | U$11.PWM_B 64.12,76.38 62.82,76.38 U$11.GND | X18.1 57.62,82.34 57.62,80.6 | U$11.GND_B 64.29,63.81 64.29,63.99 64.45,63.99 | 64.45,63.99 U$11.GND_A | U$11.GND_C U$11.GND_D 58.93,62.78 v59.21,62.5 | 64.45,63.99 v64.45,63.61
  Bottom 0.3: C63.1 57.52,73.4 | 57.52,73.4 57.36,73.55 50.58,73.55 C70.- | 57.52,73.4 58.42,72.5 61.75,72.5 | U$12.G 75.72,72.5 70.8,72.5 | 61.75,72.5 64.61,72.5 | 64.61,72.5 66.2,72.5 | 66.2,72.5 70.8,72.5 | 61.75,72.5 61.91,72.66 61.91,73.45 | C61.1 69.32,78.69 v70.8,78.69 70.8,72.5 | v59.21,62.5 v59.21,63.61 59.21,67.89 C71.2 | v64.45,63.61 64.45,66.81 C72.1 | 64.45,68.66 64.45,72.34 64.61,72.5 | 65.35,73.35 66.2,72.5
  Bottom 1: R11.2 61.91,73.45
  other vias: 69.21,78.79 57.94,75.04 58.73,75.04 58.73,75.83 58.73,74.25 63.22,76.47 64.47,76.52 64.02,75.52 62.97,75.42 63.02,74.38 70.8,77.9 70.17,76.79 70.01,77.9 70.01,78.69 70.8,77.1 59.05,64.72 64.22,74.58 64.45,62.5 64.61,64.72 59.21,60.59 64.45,61.55 59.21,59.48 64.45,59.48 59.21,61.55 64.45,60.59 61.91,59.32 65.32,75.92 71.55,79.09 71.55,78.29 72.35,79.09 64.97,75.12 71.7,77.44 70.2,75.84 47.01,83.87 47.26,81.47 49.31,82.27 50.21,83.52 51.76,81.67 52.96,82.87 54.16,82.37 55.76,83.67 56.76,81.27 49.11,80.57 46.46,70.67 49.56,69.67 44.01,68.77 43.21,72.27 44.76,74.97 43.16,77.67 45.31,80.77 51.71,69.12 45.11,71.97 46.21,69.37 44.81,77.12 43.81,80.12
  pour Top (no thermals): 57.46,79.96 57.46,77.23 56.99,76.75 56.99,75.16 58.48,73.67 59.37,73.67 59.37,76.63 58.52,76.63 57.78,77.36 57.78,80.12 59.05,81.39 59.05,84.41 46.36,84.41 46.36,79.96
  pour Bottom (no thermals): 56.99,77.36 59.05,77.36 59.05,74.09 75.4,74.09 76.2,73.29 80.01,73.29 80.01,67.46 71.94,67.46 69.45,69.96 53.81,69.96 51.43,67.58 46.36,67.58 46.36,73.13 49.84,73.13 50.96,74.25 56.99,74.25
  pour Bottom (no thermals): 62.7,77.1 66.03,77.1 66.03,73.61 61.03,73.61 61.03,75.82 62.7,75.82
  pour Bottom (no thermals): 68.94,79.48 75.4,79.48 75.4,73.29 68.94,73.29
  pour Top (no thermals): 58.42,65.51 58.42,64.72 58.58,64.72 58.73,64.56 58.73,58.37 59.74,58.37 59.74,64.51 58.73,65.51
  pour Bottom (no thermals): 57.94,66.78 58.58,66.15 58.58,58.21 65.09,58.21 65.09,70.44 58.1,70.44 57.94,70.28
  pour Top (no thermals): 68.74,79.48 73.14,79.48 73.14,77.95 69.69,74.51 69.69,78.06 68.74,78.06
  pour Top (no thermals): 63.97,58.37 63.97,64.56 64.93,65.51 64.93,58.37
  pour Top: 58.89,61.39 64.93,61.39 64.93,58.05 58.89,58.05
  pour Top (no thermals): 62.66,78.32 62.66,77.17 62.36,76.87 62.36,73.72 64.21,73.72 66.11,75.62 66.11,77.02 64.26,77.02 64.26,78.27 62.71,78.27
  pour Bottom (no thermals): 59.01,84.42 59.01,74.67 59.06,74.62 57.01,74.62 57.01,77.32 57.06,77.37 57.06,79.92 46.11,79.92 46.11,73.42 46.41,73.12 49.76,73.12 49.76,67.62 40.31,67.62 39.81,68.12 39.81,86.77 40.31,87.27 56.16,87.27
  pour Top (no thermals): 46.46,72.62 49.06,72.62 52.56,69.12 52.56,68.67 47.16,68.67 46.11,67.62 42.51,67.62 42.46,67.57 42.46,82.17 44.71,82.17 44.81,82.27 46.36,83.82 46.36,84.37 47.86,84.37 47.66,84.17 47.66,79.97 46.16,79.97 46.01,79.97 45.96,79.92 45.96,73.12
M1_1
  Top 0.3: U$1.OUT_A 23.52,4.57 C7.2 24.07,3.02 25.4,1.7 27.26,1.7 X1.2
  pour Top (no thermals): 31.91,7.25 33.96,0.29 24.6,-0.53 23.65,-0.53 23.33,-0.21 23.33,5.98 23.65,5.98 23.65,5.51 25.08,4.08 25.08,3.13 26.51,3.13 26.51,7.25
M1_2
  Top 0.3: 20.75,2.28 C5.2 | U$1.OUT_B 21.57,6.6 23.81,8.84 31.91,8.84 33.6,7.14 X1.1
  Top 0.4: 20.75,2.28 21.59,3.11 21.59,4.69 21.57,4.71 U$1.OUT_B 21.57,8.17 22.45,9.05
  pour Top (no thermals): 32.22,7.41 34.29,0.27 37.3,1.86 37.3,2.33 37.15,2.49 37.15,4.71 36.35,5.35 35.24,9.32 34.6,9.95 21.43,9.95 21.43,5.03 21.75,5.03 21.75,6.3 23.02,7.57 32.22,7.57
M1_3
  Top 0.3: 20.75,31.49 C18.2 | U$3.OUT_B 21.57,35.81 23.81,38.05 31.91,38.05 33.6,36.35 X4.1
  Top 0.4: 20.75,31.49 21.59,32.32 21.59,33.9 21.57,33.92 U$3.OUT_B 21.57,37.38 22.45,38.26
  pour Top (no thermals): 32.22,36.62 34.29,29.48 37.3,31.07 37.3,31.54 37.15,31.7 37.15,33.92 36.35,34.56 35.24,38.53 34.6,39.16 21.43,39.16 21.43,34.24 21.75,34.24 21.75,35.51 23.02,36.78 32.22,36.78
M1_4
  Top 0.3: U$3.OUT_A 23.52,33.78 C20.2 24.07,32.23 25.4,30.91 27.26,30.91 X4.2
  pour Top (no thermals): 31.91,36.46 33.96,29.5 24.6,28.68 23.65,28.68 23.33,29 23.33,35.19 23.65,35.19 23.65,34.72 25.08,33.29 25.08,32.34 26.51,32.34 26.51,36.46
M1_5
  Top 0.3: 20.75,60.7 C30.2 | U$5.OUT_B 21.57,65.02 23.81,67.26 31.91,67.26 33.6,65.56 X7.1
  Top 0.4: 20.75,60.7 21.59,61.53 21.59,63.11 21.57,63.13 U$5.OUT_B 21.57,66.59 22.45,67.47
  pour Top (no thermals): 32.22,65.83 34.29,58.69 37.3,60.28 37.3,60.75 37.15,60.91 37.15,63.13 36.35,63.77 35.24,67.74 34.6,68.37 21.43,68.37 21.43,63.45 21.75,63.45 21.75,64.72 23.02,65.99 32.22,65.99
M1_6
  Top 0.3: U$5.OUT_A 23.52,62.99 C32.2 24.07,61.44 25.4,60.12 27.26,60.12 X7.2
  pour Top (no thermals): 31.91,65.67 33.96,58.71 24.6,57.89 23.65,57.89 23.33,58.21 23.33,64.4 23.65,64.4 23.65,63.93 25.08,62.5 25.08,61.55 26.51,61.55 26.51,65.67
M1_7
  Top 0.3: 62.66,2.28 C42.2 | U$7.OUT_B 63.48,6.6 65.72,8.84 73.82,8.84 75.51,7.14 X10.1
  Top 0.4: 62.66,2.28 63.49,3.11 63.49,4.69 63.48,4.71 U$7.OUT_B 63.48,8.17 64.36,9.05
  pour Top (no thermals): 74.13,7.41 76.2,0.27 79.21,1.86 79.21,2.33 79.06,2.49 79.06,4.71 78.26,5.35 77.15,9.32 76.52,9.95 63.34,9.95 63.34,5.03 63.66,5.03 63.66,6.3 64.93,7.57 74.13,7.57
M1_8
  Top 0.3: U$7.OUT_A 65.43,4.57 C44.2 65.98,3.02 67.31,1.7 69.17,1.7 X10.2
  pour Top (no thermals): 73.82,7.25 75.87,0.29 66.51,-0.53 65.56,-0.53 65.24,-0.21 65.24,5.98 65.56,5.98 65.56,5.51 66.99,4.08 66.99,3.13 68.42,3.13 68.42,7.25
M1_9
  Top 0.3: 62.66,31.49 C54.2 | U$9.OUT_B 63.48,35.81 65.72,38.05 73.82,38.05 75.51,36.35 X13.1
  Top 0.4: 62.66,31.49 63.49,32.32 63.49,33.9 63.48,33.92 U$9.OUT_B 63.48,37.38 64.36,38.26
  pour Top (no thermals): 74.13,36.62 76.2,29.48 79.21,31.07 79.21,31.54 79.06,31.7 79.06,33.92 78.26,34.56 77.15,38.53 76.52,39.16 63.34,39.16 63.34,34.24 63.66,34.24 63.66,35.51 64.93,36.78 74.13,36.78
M1_10
  Top 0.3: U$9.OUT_A 65.43,33.78 C56.2 65.98,32.23 67.31,30.91 69.17,30.91 X13.2
  pour Top (no thermals): 73.82,36.46 75.87,29.5 66.51,28.68 65.56,28.68 65.24,29 65.24,35.19 65.56,35.19 65.56,34.72 66.99,33.29 66.99,32.34 68.42,32.34 68.42,36.46
M1_11
  Top 0.3: 62.66,60.7 C66.2 | U$11.OUT_B 63.48,65.02 65.72,67.26 73.82,67.26 75.51,65.56 X16.1
  Top 0.4: 62.66,60.7 63.49,61.53 63.49,63.11 63.48,63.13 U$11.OUT_B 63.48,66.59 64.36,67.47
  pour Top (no thermals): 74.13,65.83 76.2,58.69 79.21,60.28 79.21,60.75 79.06,60.91 79.06,63.13 78.26,63.77 77.15,67.74 76.52,68.37 63.34,68.37 63.34,63.45 63.66,63.45 63.66,64.72 64.93,65.99 74.13,65.99
M1_12
  Top 0.3: U$11.OUT_A 65.43,62.99 C68.2 65.98,61.44 67.31,60.12 69.17,60.12 X16.2
  pour Top (no thermals): 73.82,65.67 75.87,58.71 66.51,57.89 65.56,57.89 65.24,58.21 65.24,64.4 65.56,64.4 65.56,63.93 66.99,62.5 66.99,61.55 68.42,61.55 68.42,65.67
M2_1
  Top 0.3: X2.2 8.14,8.05 16.98,8.05 18.32,6.71 U$1.OUT_C
  Top 0.4: C4.2 19.21,2.36 18.31,3.26 18.31,4.69 18.32,4.7 U$1.OUT_C 18.32,9.28 18.1,9.5
  pour Top (no thermals): 7.94,7.09 6.03,0.59 4.76,0.59 3.01,2.33 3.01,4.71 3.97,5.67 5.08,9.32 5.71,9.95 18.41,9.95 18.41,5.03 18.09,5.03 18.09,6.3 16.98,7.41 7.94,7.41
M2_2
  Top 0.3: X2.1 12.42,2.01 14.6,2.01 15.77,3.18 C6.2 16.37,4.41 U$1.OUT_D
  pour Top (no thermals): 8.25,7.09 6.35,0.43 7.14,-0.37 16.51,-0.37 16.51,5.35 14.92,3.76 14.92,2.97 13.33,2.97 13.33,7.09
M2_3
  Top 0.3: X5.1 12.42,31.22 14.6,31.22 15.77,32.39 C19.2 16.37,33.62 U$3.OUT_D
  pour Top (no thermals): 8.25,36.3 6.35,29.64 7.14,28.84 16.51,28.84 16.51,34.56 14.92,32.97 14.92,32.18 13.33,32.18 13.33,36.3
M2_4
  Top 0.3: X5.2 8.14,37.26 16.98,37.26 18.32,35.92 U$3.OUT_C
  Top 0.4: C17.2 19.21,31.57 18.31,32.47 18.31,33.9 18.32,33.91 U$3.OUT_C 18.32,38.49 18.1,38.71
  pour Top (no thermals): 7.94,36.3 6.03,29.8 4.76,29.8 3.01,31.54 3.01,33.92 3.97,34.88 5.08,38.53 5.71,39.16 18.41,39.16 18.41,34.24 18.09,34.24 18.09,35.51 16.98,36.62 7.94,36.62
M2_5
  Top 0.3: X8.1 12.42,60.43 14.6,60.43 15.77,61.6 C31.2 16.37,62.83 U$5.OUT_D
  pour Top (no thermals): 8.25,65.51 6.35,58.85 7.14,58.05 16.51,58.05 16.51,63.77 14.92,62.18 14.92,61.39 13.33,61.39 13.33,65.51
M2_6
  Top 0.3: X8.2 8.14,66.47 16.98,66.47 18.32,65.13 U$5.OUT_C
  Top 0.4: C29.2 19.21,60.78 18.31,61.68 18.31,63.11 18.32,63.12 U$5.OUT_C 18.32,67.7 18.1,67.92
  pour Top (no thermals): 7.94,65.51 6.03,59.01 4.76,59.01 3.01,60.75 3.01,63.13 3.97,64.09 5.08,67.74 5.71,68.37 18.41,68.37 18.41,63.45 18.09,63.45 18.09,64.72 16.98,65.83 7.94,65.83
M2_7
  Top 0.3: X11.1 54.33,2.01 56.51,2.01 57.68,3.18 C43.2 58.28,4.41 U$7.OUT_D
  pour Top (no thermals): 50.16,7.09 48.26,0.43 49.05,-0.37 58.42,-0.37 58.42,5.35 56.83,3.76 56.83,2.97 55.24,2.97 55.24,7.09
M2_8
  Top 0.3: X11.2 50.05,8.05 58.89,8.05 60.23,6.71 U$7.OUT_C
  Top 0.4: C41.2 61.12,2.36 60.22,3.26 60.22,4.69 60.23,4.7 U$7.OUT_C 60.23,9.28 60.01,9.5
  pour Top (no thermals): 49.84,7.09 47.94,0.59 46.67,0.59 44.92,2.33 44.92,4.71 45.88,5.67 46.99,9.32 47.62,9.95 60.32,9.95 60.32,5.03 60.01,5.03 60.01,6.3 58.89,7.41 49.84,7.41
M2_9
  Top 0.3: X14.1 54.33,31.22 56.51,31.22 57.68,32.39 C55.2 58.28,33.62 U$9.OUT_D
  pour Top (no thermals): 50.16,36.3 48.26,29.64 49.05,28.84 58.42,28.84 58.42,34.56 56.83,32.97 56.83,32.18 55.24,32.18 55.24,36.3
M2_10
  Top 0.3: X14.2 50.05,37.26 58.89,37.26 60.23,35.92 U$9.OUT_C
  Top 0.4: C53.2 61.12,31.57 60.22,32.47 60.22,33.9 60.23,33.91 U$9.OUT_C 60.23,38.49 60.01,38.71
  pour Top (no thermals): 49.84,36.3 47.94,29.8 46.67,29.8 44.92,31.54 44.92,33.92 45.88,34.88 46.99,38.53 47.62,39.16 60.32,39.16 60.32,34.24 60.01,34.24 60.01,35.51 58.89,36.62 49.84,36.62
M2_11
  Top 0.3: X17.1 54.33,60.43 56.51,60.43 57.68,61.6 C67.2 58.28,62.83 U$11.OUT_D
  pour Top (no thermals): 50.16,65.51 48.26,58.85 49.05,58.05 58.42,58.05 58.42,63.77 56.83,62.18 56.83,61.39 55.24,61.39 55.24,65.51
M2_12
  Top 0.3: X17.2 50.05,66.47 58.89,66.47 60.23,65.13 U$11.OUT_C
  Top 0.4: C65.2 61.12,60.78 60.22,61.68 60.22,63.11 60.23,63.12 U$11.OUT_C 60.23,67.7 60.01,67.92
  pour Top (no thermals): 49.84,65.51 47.94,59.01 46.67,59.01 44.92,60.75 44.92,63.13 45.88,64.09 46.99,67.74 47.62,68.37 60.32,68.37 60.32,63.45 60.01,63.45 60.01,64.72 58.89,65.83 49.84,65.83
MDRST
  Top 0.4: U$1.RESET_AB 22.86,22.41 22.54,22.73 22.54,25.15 21.63,26.06 19.91,26.06 18.73,24.88 X3.2 18.73,23.6 16.36,21.23 U$1.RESET_CD
MDRST1
  Top 0.4: U$3.RESET_AB 22.86,51.62 22.54,51.94 22.54,54.36 21.63,55.27 19.91,55.27 18.73,54.09 X6.2 18.73,52.81 16.36,50.44 U$3.RESET_CD
MDRST2
  Top 0.4: U$5.RESET_AB 22.86,80.83 22.54,81.15 22.54,83.57 21.63,84.48 19.91,84.48 18.73,83.3 X9.2 18.73,82.02 16.36,79.65 U$5.RESET_CD
MDRST3
  Top 0.4: U$7.RESET_AB 64.77,22.41 64.45,22.73 64.45,25.15 63.54,26.06 61.82,26.06 60.64,24.88 X12.2 60.64,23.6 58.27,21.23 U$7.RESET_CD
MDRST4
  Top 0.4: U$9.RESET_AB 64.77,51.62 64.45,51.94 64.45,54.36 63.54,55.27 61.82,55.27 60.64,54.09 X15.2 60.64,52.81 58.27,50.44 U$9.RESET_CD
MDRST5
  Top 0.4: U$11.RESET_AB 64.77,80.83 64.45,81.15 64.45,83.57 63.54,84.48 61.82,84.48 60.64,83.3 X18.2 60.64,82.02 58.27,79.65 U$11.RESET_CD
N$1
  Top 0.4: U$3.BST_D 15.07,34.02 C19.1
N$2
  Top 0.3: 19.31,33.16 C17.1
  Top 0.4: U$3.BST_C 19.62,33.47 19.31,33.16
N$3
  Top 0.4: U$3.BST_B 20.27,33.6 C18.1
N$4
  Top 0.4: U$3.BST_A 24.82,34.23 25.77,33.28 C20.1
N$5
  Top 0.4: U$1.BST_D 15.07,4.81 C6.1
N$6
  Top 0.3: 19.31,3.95 C4.1
  Top 0.4: U$1.BST_C 19.62,4.26 19.31,3.95
N$7
  Top 0.4: U$1.BST_B 20.27,4.39 C5.1
N$8
  Top 0.4: U$1.BST_A 24.82,5.02 25.77,4.07 C7.1
N$9
  Top 0.3: R4.2
  Top 0.4: U$3.OC_ADJ R4.2
N$10
  Top 0.4: U$5.BST_D 15.07,63.23 C31.1
N$11
  Top 0.3: 19.31,62.37 C29.1
  Top 0.4: U$5.BST_C 19.62,62.68 19.31,62.37
N$12
  Top 0.3: R2.2
  Top 0.4: U$1.OC_ADJ R2.2
N$13
  Top 0.4: U$5.BST_B 20.27,62.81 C30.1
N$14
  Top 0.4: U$5.BST_A 24.82,63.44 25.77,62.49 C32.1
N$15
  Top 0.3: R6.2
  Top 0.4: U$5.OC_ADJ R6.2
N$16
  Top 0.4: U$7.BST_D 56.98,4.81 C43.1
N$17
  Top 0.3: 61.22,3.95 C41.1
  Top 0.4: U$7.BST_C 61.53,4.26 61.22,3.95
N$18
  Top 0.4: U$7.BST_B 62.18,4.39 C42.1
N$19
  Top 0.4: U$7.BST_A 66.73,5.02 67.68,4.07 C44.1
N$20
  Top 0.3: R8.2
  Top 0.4: U$7.OC_ADJ R8.2
N$21
  Top 0.4: U$9.BST_D 56.98,34.02 C55.1
N$22
  Top 0.3: 61.22,33.16 C53.1
  Top 0.4: U$9.BST_C 61.53,33.47 61.22,33.16
N$23
  Top 0.4: U$9.BST_B 62.18,33.6 C54.1
N$24
  Top 0.4: U$9.BST_A 66.73,34.23 67.68,33.28 C56.1
N$25
  Top 0.3: R10.2
  Top 0.4: U$9.OC_ADJ R10.2
N$26
  Top 0.4: U$11.BST_D 56.98,63.23 C67.1
N$27
  Top 0.3: 61.22,62.37 C65.1
  Top 0.4: U$11.BST_C 61.53,62.68 61.22,62.37
N$28
  Top 0.4: U$11.BST_B 62.18,62.81 C66.1
N$29
  Top 0.4: U$11.BST_A 66.73,63.44 67.68,62.49 C68.1
N$30
  Top 0.3: R12.2
  Top 0.4: U$11.OC_ADJ R12.2
PWM1
  Top 0.4: U$1.PWM_A 23.51,24.1 X3.4
PWM2
  Top 0.4: X3.3 17.01,20.14 U$1.PWM_C
PWM3
  Top 0.4: X6.3 17.01,49.35 U$3.PWM_C
PWM4
  Top 0.4: U$3.PWM_A 23.51,53.31 X6.4
PWM5
  Top 0.4: X9.3 17.01,78.56 U$5.PWM_C
PWM6
  Top 0.4: U$5.PWM_A 23.51,82.52 X9.4
PWM7
  Top 0.4: X12.3 58.92,20.14 U$7.PWM_C
PWM8
  Top 0.4: U$7.PWM_A 65.42,24.1 X12.4
PWM9
  Top 0.4: X15.3 58.92,49.35 U$9.PWM_C
PWM10
  Top 0.4: U$9.PWM_A 65.42,53.31 X15.4
PWM11
  Top 0.4: X18.3 58.92,78.56 U$11.PWM_C
PWM12
  Top 0.4: U$11.PWM_A 65.42,82.52 X18.4
VM  (via drill 0.35)
  Top 0.3: C1.2 26.57,22.07 25.46,20.97 U$1.GVDD_B 25.46,17.73 C3.1 25.14,16.06 25.69,15.51 26.82,15.51 26.37,15.06 27.17,15.06 | 13.63,19.44 U$1.GVDD_C U$1.VDD | 13.63,19.44 C11.2 | 13.63,19.44 13.63,17.53 v13.75,17.41 13.12,16.78 C9.+ 6.82,16.14 11.74,11.22 | U$2.+ 29.88,17.41 27.52,15.06 27.17,15.06 | 27.17,15.06 25.71,13.6 24.6,13.6 24.13,13.13 24.13,11.07 v23.81,10.75 | U$1.PVDD_C 18.97,7.01 19.76,7.81 | 19.76,7.81 19.84,7.89 20.92,6.81 U$1.PVDD_B | 19.76,7.81 19.76,12.02 | U$1.PVDD_A 24.17,6.94 v24.6,6.94 24.76,6.94 25.47,6.23 U$1.GVDD_A | 28.42,14.66 30.32,16.56
  Bottom 0.3: v24.6,6.94 24.34,7.2 C13.2 24.34,10.22 v23.81,10.75
  other vias: 25.14,17.41 10.2,17.71 7.14,18.61 12.29,17.96 9.85,16.62 11.49,16.62 13.79,18.67 7.48,20.42 12.93,16.62 26.19,17.41 26.19,16.3 25.08,16.3 14.29,6.78 15.08,6.78 15.87,6.78 13.97,5.98 13.97,5.03 23.81,6.78 25.4,6.94 25.87,6.3 25.71,5.51 12.22,10.9 12.86,10.9 13.49,10.9 14.13,10.9 14.76,10.9 15.4,10.9 24.45,10.75 25.08,10.75 25.71,10.75 26.35,10.75 27.04,10.74 25.61,16.78 25.94,18.56 25.94,20.16 25.04,21.26 25.84,22.61 10.5,19.11 9,19.71 6.05,19.71 5,18.76 8.7,18.01 5.2,17.51 4.85,20.51 11.25,20.41 14.05,20.06 12.35,19.31 27.24,24.11 29.94,24.01 31.79,23.06 33.24,24.11 35.94,22.91 34.34,19.56 37.49,19.61 36.44,21.06 35.14,21.76 30.39,26.41 26.39,26.61
  pour Top (no thermals): 4.6,20.88 4.6,14.71 7.43,14.71 11.71,10.43 30.16,10.43 34.6,14.87 37.94,14.87 38.1,15.03 38.1,19.95 37.94,20.11 32.49,20.11 27.25,14.87 16.21,14.87 10.2,20.88
  pour Top (no thermals): 15.24,20.91 15.24,18.87 14.76,18.4 14.76,16.63 17.15,14.24 10.12,14.24 10.12,20.91
  pour Bottom (no thermals): 24.65,23.34 26.67,23.34 26.67,15.98 24.65,15.98
  pour Top (no thermals): 24.89,27.8 24.89,17.36 22.54,15.01 22.54,14.4 27.51,14.4 27.51,19.32 26.51,19.32 26.51,21.38 38.2,21.38 38.2,27.8
  pour Top (no thermals): 13.65,7.09 16.19,7.09 16.19,6.3 15.87,5.98 15.87,5.19 15.55,5.19 15.55,6.3 14.6,6.3 14.6,5.03 14.13,4.55 13.65,4.55
  pour Top (no thermals): 23.97,5.82 23.97,6.3 23.33,6.3 23.33,7.25 26.19,7.25 26.19,4.71 25.71,4.71 25.4,5.03 25.4,6.3 24.45,6.3 24.45,5.82
  pour Top (no thermals): 18.73,5.82 18.73,10.59 21.11,10.59 21.11,5.82 20.63,5.82 20.63,6.3 19.21,6.3 19.21,5.98 19.05,5.82
  pour Bottom (no thermals): 10.63,4.55 16.35,4.55 16.35,7.57 15.71,8.21 15.71,11.22 12.06,11.22 10.63,9.79
  pour Bottom (no thermals): 23.49,4.7 28.1,4.7 28.1,10.45 27.33,11.22 23.49,11.22
  pour Bottom (no thermals): 4.5,21.2 4.5,15.05 4.6,14.95 7.8,14.95 8.9,16.05 14.85,16.05 14.85,21.2
  pour Bottom (no thermals): 24.6,21.65 34,21.65 34,15.85 34.55,15.3 34.6,15.25 38.1,15.25 38.1,23.55 38.05,23.6 37.4,23.6 35.5,25.5 33.6,27.4 26.1,27.4 25.2,26.5 25.2,23.6 24.95,23.35 24.65,23.35 24.65,21.75 24.6,21.7
  pour Top (no thermals): 31.5,22 31.5,18.95 34.8,15.65 37.95,15.65 38.15,15.85 38.15,22.95 38,23.1 32.6,23.1
VM1  (via drill 0.35)
  Top 0.3: C10.2 26.57,51.28 25.46,50.18 U$3.GVDD_B 25.46,46.94 C16.1 25.14,45.27 25.69,44.72 26.82,44.72 26.37,44.27 27.17,44.27 | 13.63,48.65 U$3.GVDD_C U$3.VDD | 13.63,48.65 C14.2 | 13.63,48.65 13.63,46.74 v13.75,46.62 13.12,45.99 C22.+ 6.82,45.35 11.74,40.43 | U$4.+ 29.88,46.62 27.52,44.27 27.17,44.27 | 27.17,44.27 25.71,42.81 24.6,42.81 24.13,42.34 24.13,40.28 v23.81,39.96 | U$3.PVDD_C 18.97,36.22 19.76,37.02 | 19.76,37.02 19.84,37.1 20.92,36.02 U$3.PVDD_B | 19.76,37.02 19.76,41.23 | U$3.PVDD_A 24.17,36.15 v24.6,36.15 24.76,36.15 25.47,35.44 U$3.GVDD_A | 28.42,43.87 30.32,45.77
  Bottom 0.3: v24.6,36.15 24.34,36.41 C24.2 24.34,39.43 v23.81,39.96
  other vias: 25.14,46.62 10.2,46.92 7.14,47.82 12.29,47.17 9.85,45.83 11.49,45.83 13.79,47.88 7.48,49.63 12.93,45.83 26.19,46.62 26.19,45.51 25.08,45.51 14.29,35.99 15.08,35.99 15.87,35.99 13.97,35.19 13.97,34.24 23.81,35.99 25.4,36.15 25.87,35.51 25.71,34.72 12.22,40.11 12.86,40.11 13.49,40.11 14.13,40.11 14.76,40.11 15.4,40.11 24.45,39.96 25.08,39.96 25.71,39.96 26.35,39.96 27.04,39.95 25.61,45.99 25.94,47.77 25.94,49.37 25.04,50.47 25.84,51.82 10.5,48.32 9,48.92 6.05,48.92 5,47.97 8.7,47.22 5.2,46.72 4.85,49.72 11.25,49.62 14.05,49.27 12.35,48.52 27.24,53.32 29.94,53.22 31.79,52.27 33.24,53.32 35.94,52.12 34.34,48.77 37.49,48.82 36.44,50.27 35.14,50.97 30.39,55.62 26.39,55.82
  pour Top (no thermals): 4.6,50.09 4.6,43.92 7.43,43.92 11.71,39.64 30.16,39.64 34.6,44.08 37.94,44.08 38.1,44.24 38.1,49.16 37.94,49.32 32.49,49.32 27.25,44.08 16.21,44.08 10.2,50.09
  pour Top (no thermals): 15.24,50.12 15.24,48.08 14.76,47.61 14.76,45.84 17.15,43.45 10.12,43.45 10.12,50.12
  pour Bottom (no thermals): 24.65,52.55 26.67,52.55 26.67,45.19 24.65,45.19
  pour Top (no thermals): 24.89,57.01 24.89,46.57 22.54,44.22 22.54,43.61 27.51,43.61 27.51,48.53 26.51,48.53 26.51,50.59 38.2,50.59 38.2,57.01
  pour Top (no thermals): 13.65,36.3 16.19,36.3 16.19,35.51 15.87,35.19 15.87,34.4 15.55,34.4 15.55,35.51 14.6,35.51 14.6,34.24 14.13,33.76 13.65,33.76
  pour Top (no thermals): 23.97,35.03 23.97,35.51 23.33,35.51 23.33,36.46 26.19,36.46 26.19,33.92 25.71,33.92 25.4,34.24 25.4,35.51 24.45,35.51 24.45,35.03
  pour Top (no thermals): 18.73,35.03 18.73,39.8 21.11,39.8 21.11,35.03 20.63,35.03 20.63,35.51 19.21,35.51 19.21,35.19 19.05,35.03
  pour Bottom (no thermals): 10.63,33.76 16.35,33.76 16.35,36.78 15.71,37.42 15.71,40.43 12.06,40.43 10.63,39
  pour Bottom (no thermals): 23.49,33.91 28.1,33.91 28.1,39.66 27.33,40.43 23.49,40.43
  pour Bottom (no thermals): 4.5,50.41 4.5,44.26 4.6,44.16 7.8,44.16 8.9,45.26 14.85,45.26 14.85,50.41
  pour Bottom (no thermals): 24.6,50.86 34,50.86 34,45.06 34.55,44.51 34.6,44.46 38.1,44.46 38.1,52.76 38.05,52.81 37.4,52.81 35.5,54.71 33.6,56.61 26.1,56.61 25.2,55.71 25.2,52.81 24.95,52.56 24.65,52.56 24.65,50.96 24.6,50.91
  pour Top (no thermals): 31.5,51.21 31.5,48.16 34.8,44.86 37.95,44.86 38.15,45.06 38.15,52.16 38,52.31 32.6,52.31
VM2  (via drill 0.35)
  Top 0.3: C25.2 26.57,80.49 25.46,79.39 U$5.GVDD_B 25.46,76.15 C28.1 25.14,74.48 25.69,73.93 26.82,73.93 26.37,73.48 27.17,73.48 | 13.63,77.86 U$5.GVDD_C U$5.VDD | 13.63,77.86 C26.2 | 13.63,77.86 13.63,75.95 v13.75,75.83 13.12,75.2 C34.+ 6.82,74.56 11.74,69.64 | U$6.+ 29.88,75.83 27.52,73.48 27.17,73.48 | 27.17,73.48 25.71,72.02 24.6,72.02 24.13,71.55 24.13,69.49 v23.81,69.17 | U$5.PVDD_C 18.97,65.43 19.76,66.23 | 19.76,66.23 19.84,66.31 20.92,65.23 U$5.PVDD_B | 19.76,66.23 19.76,70.44 | U$5.PVDD_A 24.17,65.36 v24.6,65.36 24.76,65.36 25.47,64.65 U$5.GVDD_A | 28.42,73.08 30.32,74.98
  Bottom 0.3: v24.6,65.36 24.34,65.62 C36.2 24.34,68.64 v23.81,69.17